# EAGLE board tqfp44-panelize (EAGLE 8.3.1)
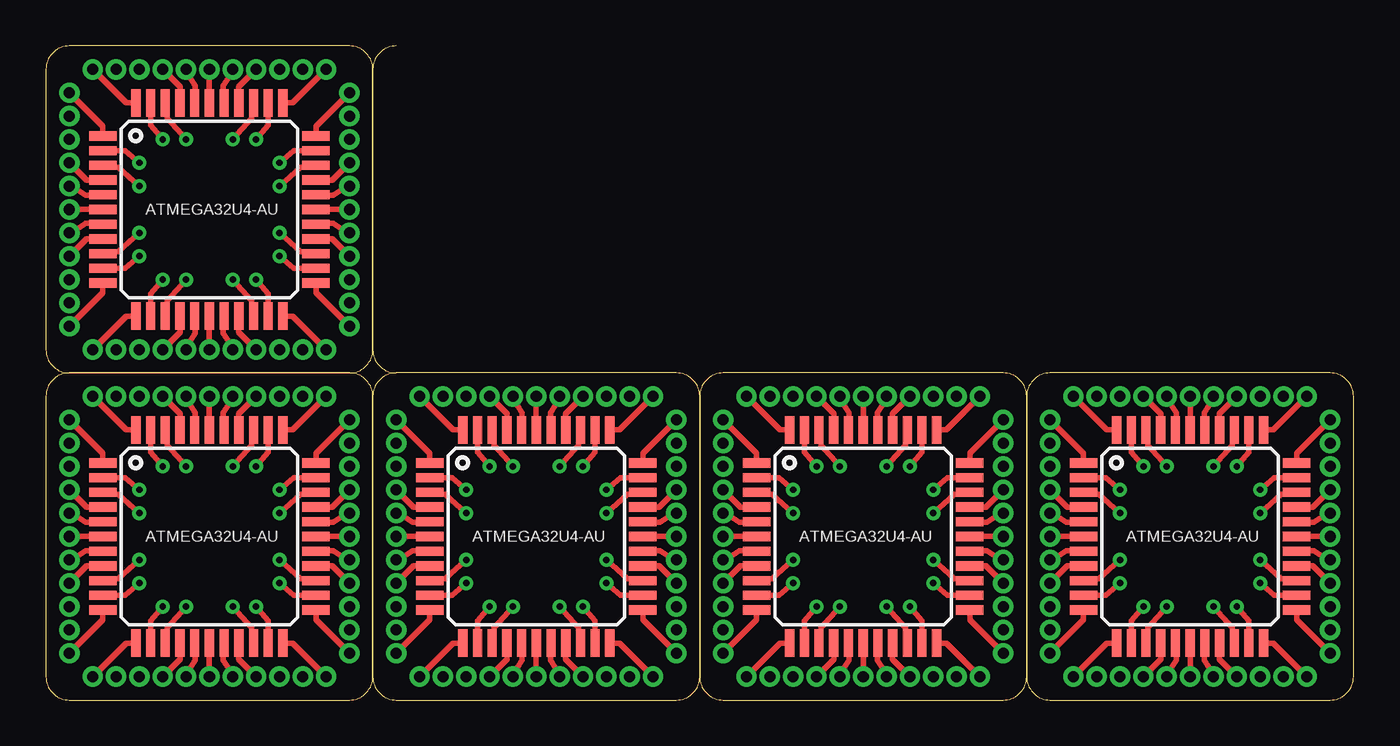
[diagram p0: board, top side]
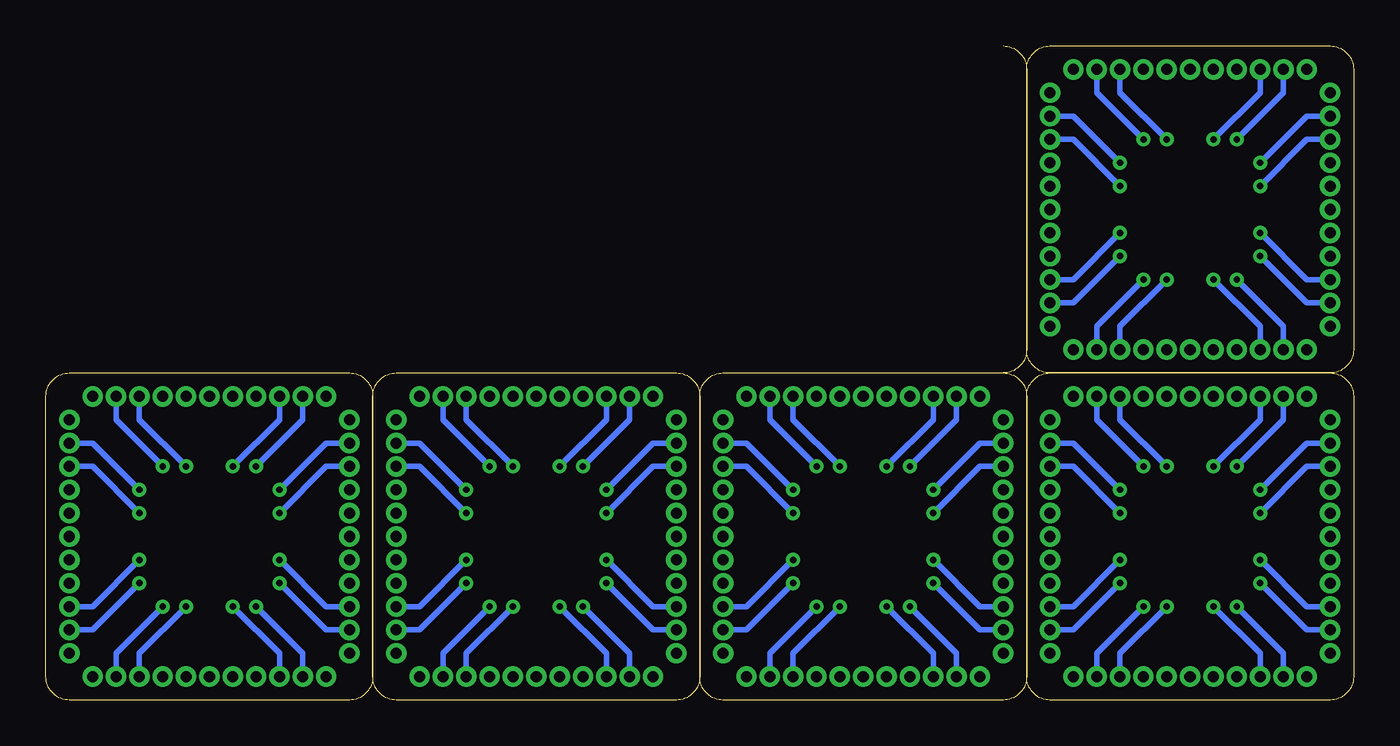
[diagram p1: board, bottom side, seen from below]

Size 71.12 x 35.56 mm. Coordinates in mm from the lower left corner, seen from the top.
Outline: 17.78,1.27 arc-90 16.51,0 1.27,0 arc-90 0,1.27 0,16.51 arc-90 1.27,17.78
Outline: 17.78,1.27 17.78,16.51
Outline: 17.78,16.51 arc90 16.51,17.78
Outline: 16.51,17.78 1.27,17.78
Outline: 35.56,1.27 arc-90 34.29,0 19.05,0 arc-90 17.78,1.27
Outline: 35.56,1.27 35.56,16.51
Outline: 35.56,16.51 arc90 34.29,17.78 19.05,17.78
Outline: 19.05,17.78 arc90 17.78,16.51
Outline: 17.78,16.51 17.78,1.27
Outline: 53.34,1.27 arc-90 52.07,0 36.83,0 arc-90 35.56,1.27
Outline: 53.34,1.27 53.34,16.51
Outline: 53.34,16.51 arc90 52.07,17.78 36.83,17.78 arc90 35.56,16.51
Outline: 35.56,16.51 35.56,1.27
Outline: 53.34,16.51 arc-90 54.61,17.78 69.85,17.78 arc-90 71.12,16.51 71.12,1.27 arc-90 69.85,0 54.61,0 arc-90 53.34,1.27
Outline: 53.34,16.51 53.34,1.27
Outline: 1.27,17.78 16.51,17.78
Outline: 16.51,17.78 arc90 17.78,19.05
Outline: 17.78,19.05 17.78,34.29
Outline: 17.78,34.29 arc90 16.51,35.56 1.27,35.56 arc90 0,34.29 0,19.05 arc90 1.27,17.78
Outline: 19.05,35.56 arc90 17.78,34.29
Outline: 17.78,34.29 17.78,19.05
Outline: 17.78,19.05 arc90 19.05,17.78
Copper layers (1*16): Top 0.035mm / dielectric 1.5mm / Bottom 0.035mm
Design rules "default *": minimum track width 6mil, minimum drill 0.35mm, track to track 6mil, track to pad 6mil, pad to pad 6mil, via to via 6mil, smd to smd 6mil, copper to edge 40mil, drill to drill 6mil, minimum pad ring 10mil, minimum via ring 8mil, stop-mask expansion 4mil, vias tented up to drill 0mil, thermal gap 10mil

## Footprints (pad centres in the part's own frame; a part is rotated, then mirrored left to right if it is on the bottom)
TQFP44 = smd 1.5 x 0.5: 1 -5.8,4; 2 -5.8,3.2; 3 -5.8,2.4; 4 -5.8,1.6; 5 -5.8,0.8; 6 -5.8,0; 7 -5.8,-0.8; 8 -5.8,-1.6; 9 -5.8,-2.4; 10 -5.8,-3.2; 11 -5.8,-4; 23 5.8,-4; 24 5.8,-3.2; 25 5.8,-2.4; 26 5.8,-1.6; 27 5.8,-0.8; 28 5.8,0; 29 5.8,0.8; 30 5.8,1.6; 31 5.8,2.4; 32 5.8,3.2; 33 5.8,4 | smd 0.5 x 1.5: 12 -4,-5.8; 13 -3.2,-5.8; 14 -2.4,-5.8; 15 -1.6,-5.8; 16 -0.8,-5.8; 17 0,-5.8; 18 0.8,-5.8; 19 1.6,-5.8; 20 2.4,-5.8; 21 3.2,-5.8; 22 4,-5.8; 34 4,5.8; 35 3.2,5.8; 36 2.4,5.8; 37 1.6,5.8; 38 0.8,5.8; 39 0,5.8; 40 -0.8,5.8; 41 -1.6,5.8; 42 -2.4,5.8; 43 -3.2,5.8; 44 -4,5.8
THROUHOLE11 = drill 0.6: 1 -6.35,0; 2 -5.08,0; 3 -3.81,0; 4 -2.54,0; 5 -1.27,0; 6 0,0; 7 1.27,0; 8 2.54,0; 9 3.81,0; 10 5.08,0; 11 6.35,0

## Placement (x,y rotation side)
IC1  ATMEGA32U4-AU  [TQFP44]  8.89,8.89 0 top
IC2  ATMEGA32U4-AU  [TQFP44]  26.67,8.89 0 top
IC3  ATMEGA32U4-AU  [TQFP44]  44.45,8.89 0 top
IC4  ATMEGA32U4-AU  [TQFP44]  62.23,8.89 0 top
IC5  ATMEGA32U4-AU  [TQFP44]  8.89,26.67 0 top
JP1  [THROUHOLE11]  1.27,8.89 270 top
JP2  [THROUHOLE11]  8.89,1.27 0 top
JP3  [THROUHOLE11]  16.51,8.89 90 top
JP4  [THROUHOLE11]  8.89,16.51 180 top
JP5  [THROUHOLE11]  19.05,8.89 270 top
JP6  [THROUHOLE11]  26.67,1.27 0 top
JP7  [THROUHOLE11]  34.29,8.89 90 top
JP8  [THROUHOLE11]  26.67,16.51 180 top
JP9  [THROUHOLE11]  36.83,8.89 270 top
JP10  [THROUHOLE11]  44.45,1.27 0 top
JP11  [THROUHOLE11]  52.07,8.89 90 top
JP12  [THROUHOLE11]  44.45,16.51 180 top
JP13  [THROUHOLE11]  54.61,8.89 270 top
JP14  [THROUHOLE11]  62.23,1.27 0 top
JP15  [THROUHOLE11]  69.85,8.89 90 top
JP16  [THROUHOLE11]  62.23,16.51 180 top
JP17  [THROUHOLE11]  1.27,26.67 270 top
JP18  [THROUHOLE11]  8.89,19.05 0 top
JP19  [THROUHOLE11]  16.51,26.67 90 top
JP20  [THROUHOLE11]  8.89,34.29 180 top

## Library data of the parts
IC1-IC5 = avr
JP1-JP20 = pinhead-half-pitch

## Nets
AREF: IC1.42 JP4.9
AREF1: IC2.42 JP8.9
AREF2: IC3.42 JP12.9
AREF3: IC4.42 JP16.9
AREF4: IC5.42 JP20.9
AVCC: IC1.24 JP3.2
AVCC1: IC1.44 JP4.11
AVCC2: IC2.24 JP7.2
AVCC3: IC2.44 JP8.11
AVCC4: IC3.24 JP11.2
AVCC5: IC3.44 JP12.11
AVCC6: IC4.24 JP15.2
AVCC7: IC4.44 JP16.11
AVCC8: IC5.24 JP19.2
AVCC9: IC5.44 JP20.11
D+: IC1.4 JP1.4
D+1: IC2.4 JP5.4
D+2: IC3.4 JP9.4
D+3: IC4.4 JP13.4
D+4: IC5.4 JP17.4
D-: IC1.3 JP1.3
D-1: IC2.3 JP5.3
D-2: IC3.3 JP9.3
D-3: IC4.3 JP13.3
D-4: IC5.3 JP17.3
GND: IC1.15 JP2.4
GND1: IC1.23 JP3.1
GND2: IC1.35 JP4.2
GND3: IC1.43 JP4.10
GND4: IC2.15 JP6.4
GND5: IC2.23 JP7.1
GND6: IC2.35 JP8.2
GND7: IC2.43 JP8.10
GND8: IC3.15 JP10.4
GND9: IC3.23 JP11.1
GND10: IC3.35 JP12.2
GND11: IC3.43 JP12.10
GND12: IC4.15 JP14.4
GND13: IC4.23 JP15.1
GND14: IC4.35 JP16.2
GND15: IC4.43 JP16.10
GND16: IC5.15 JP18.4
GND17: IC5.23 JP19.1
GND18: IC5.35 JP20.2
GND19: IC5.43 JP20.10
PB0: IC1.8 JP1.8
PB1: IC1.9 JP1.9
PB2: IC1.10 JP1.10
PB3: IC1.11 JP1.11
PB4: IC1.28 JP3.6
PB5: IC1.29 JP3.7
PB6: IC1.30 JP3.8
PB7: IC1.12 JP2.1
PB8: IC2.12 JP6.1
PB9: IC2.30 JP7.8
PB10: IC2.29 JP7.7
PB11: IC2.28 JP7.6
PB12: IC2.11 JP5.11
PB13: IC2.10 JP5.10
PB14: IC2.9 JP5.9
PB15: IC2.8 JP5.8
PB16: IC3.12 JP10.1
PB17: IC3.30 JP11.8
PB18: IC3.29 JP11.7
PB19: IC3.28 JP11.6
PB20: IC3.11 JP9.11
PB21: IC3.10 JP9.10
PB22: IC3.9 JP9.9
PB23: IC3.8 JP9.8
PB24: IC4.12 JP14.1
PB25: IC4.30 JP15.8
PB26: IC4.29 JP15.7
PB27: IC4.28 JP15.6
PB28: IC4.11 JP13.11
PB29: IC4.10 JP13.10
PB30: IC4.9 JP13.9
PB31: IC4.8 JP13.8
PB32: IC5.12 JP18.1
PB33: IC5.30 JP19.8
PB34: IC5.29 JP19.7
PB35: IC5.28 JP19.6
PB36: IC5.11 JP17.11
PB37: IC5.10 JP17.10
PB38: IC5.9 JP17.9
PB39: IC5.8 JP17.8
PC1: IC2.31 JP7.9
PC2: IC2.32 JP7.10
PC3: IC3.31 JP11.9
PC4: IC3.32 JP11.10
PC5: IC4.31 JP15.9
PC6: IC1.31 JP3.9
PC7: IC1.32 JP3.10
PC8: IC4.32 JP15.10
PC9: IC5.31 JP19.9
PC10: IC5.32 JP19.10
PD0: IC1.18 JP2.7
PD1: IC1.19 JP2.8
PD2: IC1.20 JP2.9
PD3: IC1.21 JP2.10
PD4: IC1.25 JP3.3
PD5: IC1.22 JP2.11
PD6: IC1.26 JP3.4
PD7: IC1.27 JP3.5
PD8: IC2.27 JP7.5
PD9: IC2.26 JP7.4
PD10: IC2.22 JP6.11
PD11: IC2.25 JP7.3
PD12: IC2.21 JP6.10
PD13: IC2.20 JP6.9
PD14: IC2.19 JP6.8
PD15: IC2.18 JP6.7
PD16: IC3.27 JP11.5
PD17: IC3.26 JP11.4
PD18: IC3.22 JP10.11
PD19: IC3.25 JP11.3
PD20: IC3.21 JP10.10
PD21: IC3.20 JP10.9
PD22: IC3.19 JP10.8
PD23: IC3.18 JP10.7
PD24: IC4.27 JP15.5
PD25: IC4.26 JP15.4
PD26: IC4.22 JP14.11
PD27: IC4.25 JP15.3
PD28: IC4.21 JP14.10
PD29: IC4.20 JP14.9
PD30: IC4.19 JP14.8
PD31: IC4.18 JP14.7
PD32: IC5.27 JP19.5
PD33: IC5.26 JP19.4
PD34: IC5.22 JP18.11
PD35: IC5.25 JP19.3
PD36: IC5.21 JP18.10
PD37: IC5.20 JP18.9
PD38: IC5.19 JP18.8
PD39: IC5.18 JP18.7
PE1: IC2.33 JP7.11
PE2: IC1.33 JP3.11
PE3: IC2.1 JP5.1
PE4: IC3.33 JP11.11
PE5: IC3.1 JP9.1
PE6: IC1.1 JP1.1
PE7: IC4.33 JP15.11
PE8: IC4.1 JP13.1
PE9: IC5.33 JP19.11
PE10: IC5.1 JP17.1
PF0: IC1.41 JP4.8
PF1: IC1.40 JP4.7
PF2: IC2.41 JP8.8
PF3: IC2.40 JP8.7
PF4: IC1.39 JP4.6
PF5: IC1.38 JP4.5
PF6: IC1.37 JP4.4
PF7: IC1.36 JP4.3
PF8: IC2.39 JP8.6
PF9: IC2.38 JP8.5
PF10: IC2.37 JP8.4
PF11: IC2.36 JP8.3
PF12: IC3.41 JP12.8
PF13: IC3.40 JP12.7
PF14: IC3.39 JP12.6
PF15: IC3.38 JP12.5
PF16: IC3.37 JP12.4
PF17: IC3.36 JP12.3
PF18: IC4.41 JP16.8
PF19: IC4.40 JP16.7
PF20: IC4.39 JP16.6
PF21: IC4.38 JP16.5
PF22: IC4.37 JP16.4
PF23: IC4.36 JP16.3
PF24: IC5.41 JP20.8
PF25: IC5.40 JP20.7
PF26: IC5.39 JP20.6
PF27: IC5.38 JP20.5
PF28: IC5.37 JP20.4
PF29: IC5.36 JP20.3
RESET: IC1.13 JP2.2
RESET1: IC2.13 JP6.2
RESET2: IC3.13 JP10.2
RESET3: IC4.13 JP14.2
RESET4: IC5.13 JP18.2
UCAP: IC1.6 JP1.6
UCAP1: IC2.6 JP5.6
UCAP2: IC3.6 JP9.6
UCAP3: IC4.6 JP13.6
UCAP4: IC5.6 JP17.6
UGND: IC1.5 JP1.5
UGND1: IC2.5 JP5.5
UGND2: IC3.5 JP9.5
UGND3: IC4.5 JP13.5
UGND4: IC5.5 JP17.5
UVCC: IC1.2 JP1.2
UVCC1: IC2.2 JP5.2
UVCC2: IC3.2 JP9.2
UVCC3: IC4.2 JP13.2
UVCC4: IC5.2 JP17.2
VBUS: IC1.7 JP1.7
VBUS1: IC2.7 JP5.7
VBUS2: IC3.7 JP9.7
VBUS3: IC4.7 JP13.7
VBUS4: IC5.7 JP17.7
VCC: IC1.14 JP2.3
VCC1: IC1.34 JP4.1
VCC2: IC2.14 JP6.3
VCC3: IC2.34 JP8.1
VCC4: IC3.14 JP10.3
VCC5: IC3.34 JP12.1
VCC6: IC4.14 JP14.3
VCC7: IC4.34 JP16.1
VCC8: IC5.14 JP18.3
VCC9: IC5.34 JP20.1
XTAL1: IC1.17 JP2.6
XTAL2: IC1.16 JP2.5
XTAL3: IC2.17 JP6.6
XTAL4: IC2.16 JP6.5
XTAL5: IC3.17 JP10.6
XTAL6: IC3.16 JP10.5
XTAL7: IC4.17 JP14.6
XTAL8: IC4.16 JP14.5
XTAL9: IC5.17 JP18.6
XTAL10: IC5.16 JP18.5

## Tracks (layer width: path | path; a pad name or v marks a point on that pad's centre or on a via)
AREF  (via drill 0.35)
  Top 0.305: IC1.42 6.6,13.84 v7.62,12.7
  Bottom 0.305: JP4.9 5.08,15.24 v7.62,12.7
AREF1  (via drill 0.35)
  Top 0.305: IC2.42 24.38,13.84 v25.4,12.7
  Bottom 0.305: JP8.9 22.86,15.24 v25.4,12.7
AREF2  (via drill 0.35)
  Top 0.305: IC3.42 42.16,13.84 v43.18,12.7
  Bottom 0.305: JP12.9 40.64,15.24 v43.18,12.7
AREF3  (via drill 0.35)
  Top 0.305: IC4.42 59.94,13.84 v60.96,12.7
  Bottom 0.305: JP16.9 58.42,15.24 v60.96,12.7
AREF4  (via drill 0.35)
  Top 0.305: IC5.42 6.6,31.62 v7.62,30.48
  Bottom 0.305: JP20.9 5.08,33.02 v7.62,30.48
AVCC  (via drill 0.35)
  Top 0.305: IC1.24 13.46,5.69 v12.7,6.35
  Bottom 0.305: v12.7,6.35 15.24,3.81 JP3.2
AVCC1
  Top 0.305: IC1.44 4.36,14.69 JP4.11
AVCC2  (via drill 0.35)
  Top 0.305: IC2.24 31.24,5.69 v30.48,6.35
  Bottom 0.305: v30.48,6.35 33.02,3.81 JP7.2
AVCC3
  Top 0.305: IC2.44 22.14,14.69 JP8.11
AVCC4  (via drill 0.35)
  Top 0.305: IC3.24 49.02,5.69 v48.26,6.35
  Bottom 0.305: v48.26,6.35 50.8,3.81 JP11.2
AVCC5
  Top 0.305: IC3.44 39.92,14.69 JP12.11
AVCC6  (via drill 0.35)
  Top 0.305: IC4.24 66.8,5.69 v66.04,6.35
  Bottom 0.305: v66.04,6.35 68.58,3.81 JP15.2
AVCC7
  Top 0.305: IC4.44 57.7,14.69 JP16.11
AVCC8  (via drill 0.35)
  Top 0.305: IC5.24 13.46,23.47 v12.7,24.13
  Bottom 0.305: v12.7,24.13 15.24,21.59 JP19.2
AVCC9
  Top 0.305: IC5.44 4.36,32.47 JP20.11
D+
  Top 0.305: IC1.4 2.21,10.49 JP1.4
D+1
  Top 0.305: IC2.4 19.99,10.49 JP5.4
D+2
  Top 0.305: IC3.4 37.77,10.49 JP9.4
D+3
  Top 0.305: IC4.4 55.55,10.49 JP13.4
D+4
  Top 0.305: IC5.4 2.21,28.27 JP17.4
D-  (via drill 0.35)
  Top 0.305: IC1.3 3.94,11.18 v5.08,10.16
  Bottom 0.305: JP1.3 2.54,12.7 v5.08,10.16
D-1  (via drill 0.35)
  Top 0.305: IC2.3 21.72,11.18 v22.86,10.16
  Bottom 0.305: JP5.3 20.32,12.7 v22.86,10.16
D-2  (via drill 0.35)
  Top 0.305: IC3.3 39.5,11.18 v40.64,10.16
  Bottom 0.305: JP9.3 38.1,12.7 v40.64,10.16
D-3  (via drill 0.35)
  Top 0.305: IC4.3 57.28,11.18 v58.42,10.16
  Bottom 0.305: JP13.3 55.88,12.7 v58.42,10.16
D-4  (via drill 0.35)
  Top 0.305: IC5.3 3.94,28.96 v5.08,27.94
  Bottom 0.305: JP17.3 2.54,30.48 v5.08,27.94
GND
  Top 0.305: IC1.15 7.29,2.21 JP2.4
GND1
  Top 0.305: IC1.23 14.69,4.36 JP3.1
GND2  (via drill 0.35)
  Top 0.305: IC1.35 12.09,13.46 v11.43,12.7
  Bottom 0.305: v11.43,12.7 13.97,15.24 JP4.2
GND3  (via drill 0.35)
  Top 0.305: IC1.43 5.69,13.46 v6.35,12.7
  Bottom 0.305: v6.35,12.7 3.81,15.24 JP4.10
GND4
  Top 0.305: IC2.15 25.07,2.21 JP6.4
GND5
  Top 0.305: IC2.23 32.47,4.36 JP7.1
GND6  (via drill 0.35)
  Top 0.305: IC2.35 29.87,13.46 v29.21,12.7
  Bottom 0.305: v29.21,12.7 31.75,15.24 JP8.2
GND7  (via drill 0.35)
  Top 0.305: IC2.43 23.47,13.46 v24.13,12.7
  Bottom 0.305: v24.13,12.7 21.59,15.24 JP8.10
GND8
  Top 0.305: IC3.15 42.85,2.21 JP10.4
GND9
  Top 0.305: IC3.23 50.25,4.36 JP11.1
GND10  (via drill 0.35)
  Top 0.305: IC3.35 47.65,13.46 v46.99,12.7
  Bottom 0.305: v46.99,12.7 49.53,15.24 JP12.2
GND11  (via drill 0.35)
  Top 0.305: IC3.43 41.25,13.46 v41.91,12.7
  Bottom 0.305: v41.91,12.7 39.37,15.24 JP12.10
GND12
  Top 0.305: IC4.15 60.63,2.21 JP14.4
GND13
  Top 0.305: IC4.23 68.03,4.36 JP15.1
GND14  (via drill 0.35)
  Top 0.305: IC4.35 65.43,13.46 v64.77,12.7
  Bottom 0.305: v64.77,12.7 67.31,15.24 JP16.2
GND15  (via drill 0.35)
  Top 0.305: IC4.43 59.03,13.46 v59.69,12.7
  Bottom 0.305: v59.69,12.7 57.15,15.24 JP16.10
GND16
  Top 0.305: IC5.15 7.29,19.99 JP18.4
GND17
  Top 0.305: IC5.23 14.69,22.14 JP19.1
GND18  (via drill 0.35)
  Top 0.305: IC5.35 12.09,31.24 v11.43,30.48
  Bottom 0.305: v11.43,30.48 13.97,33.02 JP20.2
GND19  (via drill 0.35)
  Top 0.305: IC5.43 5.69,31.24 v6.35,30.48
  Bottom 0.305: v6.35,30.48 3.81,33.02 JP20.10
PB0
  Top 0.305: IC1.8 2.21,7.29 JP1.8
PB1  (via drill 0.35)
  Top 0.305: IC1.9 3.94,6.6 v5.08,7.62
  Bottom 0.305: JP1.9 2.54,5.08 v5.08,7.62
PB2  (via drill 0.35)
  Top 0.305: IC1.10 4.32,5.69 v5.08,6.35
  Bottom 0.305: v5.08,6.35 2.54,3.81 JP1.10
PB3
  Top 0.305: IC1.11 3.09,4.36 JP1.11
PB4
  Top 0.305: JP3.6 IC1.28
PB5
  Top 0.305: JP3.7 16.38,10.16 15.62,9.65 14.78,9.65 IC1.29
PB6
  Top 0.305: IC1.30 15.57,10.49 JP3.8
PB7
  Top 0.305: IC1.12 4.36,3.09 JP2.1
PB8
  Top 0.305: IC2.12 22.14,3.09 JP6.1
PB9
  Top 0.305: IC2.30 33.35,10.49 JP7.8
PB10
  Top 0.305: JP7.7 34.16,10.16 33.4,9.65 32.56,9.65 IC2.29
PB11
  Top 0.305: JP7.6 IC2.28
PB12
  Top 0.305: IC2.11 20.87,4.36 JP5.11
PB13  (via drill 0.35)
  Top 0.305: IC2.10 22.1,5.69 v22.86,6.35
  Bottom 0.305: v22.86,6.35 20.32,3.81 JP5.10
PB14  (via drill 0.35)
  Top 0.305: IC2.9 21.72,6.6 v22.86,7.62
  Bottom 0.305: JP5.9 20.32,5.08 v22.86,7.62
PB15
  Top 0.305: IC2.8 19.99,7.29 JP5.8
PB16
  Top 0.305: IC3.12 39.92,3.09 JP10.1
PB17
  Top 0.305: IC3.30 51.13,10.49 JP11.8
PB18
  Top 0.305: JP11.7 51.94,10.16 51.18,9.65 50.34,9.65 IC3.29
PB19
  Top 0.305: JP11.6 IC3.28
PB20
  Top 0.305: IC3.11 38.65,4.36 JP9.11
PB21  (via drill 0.35)
  Top 0.305: IC3.10 39.88,5.69 v40.64,6.35
  Bottom 0.305: v40.64,6.35 38.1,3.81 JP9.10
PB22  (via drill 0.35)
  Top 0.305: IC3.9 39.5,6.6 v40.64,7.62
  Bottom 0.305: JP9.9 38.1,5.08 v40.64,7.62
PB23
  Top 0.305: IC3.8 37.77,7.29 JP9.8
PB24
  Top 0.305: IC4.12 57.7,3.09 JP14.1
PB25
  Top 0.305: IC4.30 68.91,10.49 JP15.8
PB26
  Top 0.305: JP15.7 69.72,10.16 68.96,9.65 68.12,9.65 IC4.29
PB27
  Top 0.305: JP15.6 IC4.28
PB28
  Top 0.305: IC4.11 56.43,4.36 JP13.11
PB29  (via drill 0.35)
  Top 0.305: IC4.10 57.66,5.69 v58.42,6.35
  Bottom 0.305: v58.42,6.35 55.88,3.81 JP13.10
PB30  (via drill 0.35)
  Top 0.305: IC4.9 57.28,6.6 v58.42,7.62
  Bottom 0.305: JP13.9 55.88,5.08 v58.42,7.62
PB31
  Top 0.305: IC4.8 55.55,7.29 JP13.8
PB32
  Top 0.305: IC5.12 4.36,20.87 JP18.1
PB33
  Top 0.305: IC5.30 15.57,28.27 JP19.8
PB34
  Top 0.305: JP19.7 16.38,27.94 15.62,27.43 14.78,27.43 IC5.29
PB35
  Top 0.305: JP19.6 IC5.28
PB36
  Top 0.305: IC5.11 3.09,22.14 JP17.11
PB37  (via drill 0.35)
  Top 0.305: IC5.10 4.32,23.47 v5.08,24.13
  Bottom 0.305: v5.08,24.13 2.54,21.59 JP17.10
PB38  (via drill 0.35)
  Top 0.305: IC5.9 3.94,24.38 v5.08,25.4
  Bottom 0.305: JP17.9 2.54,22.86 v5.08,25.4
PB39
  Top 0.305: IC5.8 2.21,25.07 JP17.8
PC1  (via drill 0.35)
  Top 0.305: IC2.31 31.62,11.18 v30.48,10.16
  Bottom 0.305: JP7.9 33.02,12.7 v30.48,10.16
PC2  (via drill 0.35)
  Top 0.305: IC2.32 31.24,12.09 v30.48,11.43
  Bottom 0.305: v30.48,11.43 33.02,13.97 JP7.10
PC3  (via drill 0.35)
  Top 0.305: IC3.31 49.4,11.18 v48.26,10.16
  Bottom 0.305: JP11.9 50.8,12.7 v48.26,10.16
PC4  (via drill 0.35)
  Top 0.305: IC3.32 49.02,12.09 v48.26,11.43
  Bottom 0.305: v48.26,11.43 50.8,13.97 JP11.10
PC5  (via drill 0.35)
  Top 0.305: IC4.31 67.18,11.18 v66.04,10.16
  Bottom 0.305: JP15.9 68.58,12.7 v66.04,10.16
PC6  (via drill 0.35)
  Top 0.305: IC1.31 13.84,11.18 v12.7,10.16
  Bottom 0.305: JP3.9 15.24,12.7 v12.7,10.16
PC7  (via drill 0.35)
  Top 0.305: IC1.32 13.46,12.09 v12.7,11.43
  Bottom 0.305: v12.7,11.43 15.24,13.97 JP3.10
PC8  (via drill 0.35)
  Top 0.305: IC4.32 66.8,12.09 v66.04,11.43
  Bottom 0.305: v66.04,11.43 68.58,13.97 JP15.10
PC9  (via drill 0.35)
  Top 0.305: IC5.31 13.84,28.96 v12.7,27.94
  Bottom 0.305: JP19.9 15.24,30.48 v12.7,27.94
PC10  (via drill 0.35)
  Top 0.305: IC5.32 13.46,29.87 v12.7,29.21
  Bottom 0.305: v12.7,29.21 15.24,31.75 JP19.10
PD0
  Top 0.305: JP2.7 10.16,1.4 9.65,2.16 9.65,3 IC1.18
PD1
  Top 0.305: IC1.19 10.49,2.21 JP2.8
PD2  (via drill 0.35)
  Top 0.305: IC1.20 11.18,3.94 v10.16,5.08
  Bottom 0.305: JP2.9 12.7,2.54 v10.16,5.08
PD3  (via drill 0.35)
  Top 0.305: IC1.21 12.09,4.32 v11.43,5.08
  Bottom 0.305: v11.43,5.08 13.97,2.54 JP2.10
PD4  (via drill 0.35)
  Top 0.305: IC1.25 13.84,6.6 v12.7,7.62
  Bottom 0.305: JP3.3 15.24,5.08 v12.7,7.62
PD5
  Top 0.305: IC1.22 13.42,3.09 JP2.11
PD6
  Top 0.305: IC1.26 15.57,7.29 JP3.4
PD7
  Top 0.305: JP3.5 16.38,7.62 15.62,8.13 14.78,8.13 IC1.27
PD8
  Top 0.305: JP7.5 34.16,7.62 33.4,8.13 32.56,8.13 IC2.27
PD9
  Top 0.305: IC2.26 33.35,7.29 JP7.4
PD10
  Top 0.305: IC2.22 31.2,3.09 JP6.11
PD11  (via drill 0.35)
  Top 0.305: IC2.25 31.62,6.6 v30.48,7.62
  Bottom 0.305: JP7.3 33.02,5.08 v30.48,7.62
PD12  (via drill 0.35)
  Top 0.305: IC2.21 29.87,4.32 v29.21,5.08
  Bottom 0.305: v29.21,5.08 31.75,2.54 JP6.10
PD13  (via drill 0.35)
  Top 0.305: IC2.20 28.96,3.94 v27.94,5.08
  Bottom 0.305: JP6.9 30.48,2.54 v27.94,5.08
PD14
  Top 0.305: IC2.19 28.27,2.21 JP6.8
PD15
  Top 0.305: JP6.7 27.94,1.4 27.43,2.16 27.43,3 IC2.18
PD16
  Top 0.305: JP11.5 51.94,7.62 51.18,8.13 50.34,8.13 IC3.27
PD17
  Top 0.305: IC3.26 51.13,7.29 JP11.4
PD18
  Top 0.305: IC3.22 48.98,3.09 JP10.11
PD19  (via drill 0.35)
  Top 0.305: IC3.25 49.4,6.6 v48.26,7.62
  Bottom 0.305: JP11.3 50.8,5.08 v48.26,7.62
PD20  (via drill 0.35)
  Top 0.305: IC3.21 47.65,4.32 v46.99,5.08
  Bottom 0.305: v46.99,5.08 49.53,2.54 JP10.10
PD21  (via drill 0.35)
  Top 0.305: IC3.20 46.74,3.94 v45.72,5.08
  Bottom 0.305: JP10.9 48.26,2.54 v45.72,5.08
PD22
  Top 0.305: IC3.19 46.05,2.21 JP10.8
PD23
  Top 0.305: JP10.7 45.72,1.4 45.21,2.16 45.21,3 IC3.18
PD24
  Top 0.305: JP15.5 69.72,7.62 68.96,8.13 68.12,8.13 IC4.27
PD25
  Top 0.305: IC4.26 68.91,7.29 JP15.4
PD26
  Top 0.305: IC4.22 66.76,3.09 JP14.11
PD27  (via drill 0.35)
  Top 0.305: IC4.25 67.18,6.6 v66.04,7.62
  Bottom 0.305: JP15.3 68.58,5.08 v66.04,7.62
PD28  (via drill 0.35)
  Top 0.305: IC4.21 65.43,4.32 v64.77,5.08
  Bottom 0.305: v64.77,5.08 67.31,2.54 JP14.10
PD29  (via drill 0.35)
  Top 0.305: IC4.20 64.52,3.94 v63.5,5.08
  Bottom 0.305: JP14.9 66.04,2.54 v63.5,5.08
PD30
  Top 0.305: IC4.19 63.83,2.21 JP14.8
PD31
  Top 0.305: JP14.7 63.5,1.4 62.99,2.16 62.99,3 IC4.18
PD32
  Top 0.305: JP19.5 16.38,25.4 15.62,25.91 14.78,25.91 IC5.27
PD33
  Top 0.305: IC5.26 15.57,25.07 JP19.4
PD34
  Top 0.305: IC5.22 13.42,20.87 JP18.11
PD35  (via drill 0.35)
  Top 0.305: IC5.25 13.84,24.38 v12.7,25.4
  Bottom 0.305: JP19.3 15.24,22.86 v12.7,25.4
PD36  (via drill 0.35)
  Top 0.305: IC5.21 12.09,22.1 v11.43,22.86
  Bottom 0.305: v11.43,22.86 13.97,20.32 JP18.10
PD37  (via drill 0.35)
  Top 0.305: IC5.20 11.18,21.72 v10.16,22.86
  Bottom 0.305: JP18.9 12.7,20.32 v10.16,22.86
PD38
  Top 0.305: IC5.19 10.49,19.99 JP18.8
PD39
  Top 0.305: JP18.7 10.16,19.18 9.65,19.94 9.65,20.78 IC5.18
PE1
  Top 0.305: IC2.33 32.47,13.42 JP7.11
PE2
  Top 0.305: IC1.33 14.69,13.42 JP3.11
PE3
  Top 0.305: IC2.1 20.87,13.42 JP5.1
PE4
  Top 0.305: IC3.33 50.25,13.42 JP11.11
PE5
  Top 0.305: IC3.1 38.65,13.42 JP9.1
PE6
  Top 0.305: IC1.1 3.09,13.42 JP1.1
PE7
  Top 0.305: IC4.33 68.03,13.42 JP15.11
PE8
  Top 0.305: IC4.1 56.43,13.42 JP13.1
PE9
  Top 0.305: IC5.33 14.69,31.2 JP19.11
PE10
  Top 0.305: IC5.1 3.09,31.2 JP17.1
PF0
  Top 0.305: IC1.41 7.29,15.57 JP4.8
PF1
  Top 0.305: JP4.7 7.62,16.38 8.13,15.62 8.13,14.78 IC1.40
PF2
  Top 0.305: IC2.41 25.07,15.57 JP8.8
PF3
  Top 0.305: JP8.7 25.4,16.38 25.91,15.62 25.91,14.78 IC2.40
PF4
  Top 0.305: JP4.6 IC1.39
PF5
  Top 0.305: JP4.5 10.16,16.38 9.65,15.62 9.65,14.78 IC1.38
PF6
  Top 0.305: IC1.37 10.49,15.57 JP4.4
PF7  (via drill 0.35)
  Top 0.305: IC1.36 11.18,13.84 v10.16,12.7
  Bottom 0.305: JP4.3 12.7,15.24 v10.16,12.7
PF8
  Top 0.305: JP8.6 IC2.39
PF9
  Top 0.305: JP8.5 27.94,16.38 27.43,15.62 27.43,14.78 IC2.38
PF10
  Top 0.305: IC2.37 28.27,15.57 JP8.4
PF11  (via drill 0.35)
  Top 0.305: IC2.36 28.96,13.84 v27.94,12.7
  Bottom 0.305: JP8.3 30.48,15.24 v27.94,12.7
PF12
  Top 0.305: IC3.41 42.85,15.57 JP12.8
PF13
  Top 0.305: JP12.7 43.18,16.38 43.69,15.62 43.69,14.78 IC3.40
PF14
  Top 0.305: JP12.6 IC3.39
PF15
  Top 0.305: JP12.5 45.72,16.38 45.21,15.62 45.21,14.78 IC3.38
PF16
  Top 0.305: IC3.37 46.05,15.57 JP12.4
PF17  (via drill 0.35)
  Top 0.305: IC3.36 46.74,13.84 v45.72,12.7
  Bottom 0.305: JP12.3 48.26,15.24 v45.72,12.7
PF18
  Top 0.305: IC4.41 60.63,15.57 JP16.8
PF19
  Top 0.305: JP16.7 60.96,16.38 61.47,15.62 61.47,14.78 IC4.40
PF20
  Top 0.305: JP16.6 IC4.39
PF21
  Top 0.305: JP16.5 63.5,16.38 62.99,15.62 62.99,14.78 IC4.38
PF22
  Top 0.305: IC4.37 63.83,15.57 JP16.4
PF23  (via drill 0.35)
  Top 0.305: IC4.36 64.52,13.84 v63.5,12.7
  Bottom 0.305: JP16.3 66.04,15.24 v63.5,12.7
PF24
  Top 0.305: IC5.41 7.29,33.35 JP20.8
PF25
  Top 0.305: JP20.7 7.62,34.16 8.13,33.4 8.13,32.56 IC5.40
PF26
  Top 0.305: JP20.6 IC5.39
PF27
  Top 0.305: JP20.5 10.16,34.16 9.65,33.4 9.65,32.56 IC5.38
PF28
  Top 0.305: IC5.37 10.49,33.35 JP20.4
PF29  (via drill 0.35)
  Top 0.305: IC5.36 11.18,31.62 v10.16,30.48
  Bottom 0.305: JP20.3 12.7,33.02 v10.16,30.48
RESET  (via drill 0.35)
  Top 0.305: IC1.13 5.69,4.32 v6.35,5.08
  Bottom 0.305: v6.35,5.08 3.81,2.54 JP2.2
RESET1  (via drill 0.35)
  Top 0.305: IC2.13 23.47,4.32 v24.13,5.08
  Bottom 0.305: v24.13,5.08 21.59,2.54 JP6.2
RESET2  (via drill 0.35)
  Top 0.305: IC3.13 41.25,4.32 v41.91,5.08
  Bottom 0.305: v41.91,5.08 39.37,2.54 JP10.2
RESET3  (via drill 0.35)
  Top 0.305: IC4.13 59.03,4.32 v59.69,5.08
  Bottom 0.305: v59.69,5.08 57.15,2.54 JP14.2
RESET4  (via drill 0.35)
  Top 0.305: IC5.13 5.69,22.1 v6.35,22.86
  Bottom 0.305: v6.35,22.86 3.81,20.32 JP18.2
UCAP
  Top 0.305: JP1.6 IC1.6
UCAP1
  Top 0.305: JP5.6 IC2.6
UCAP2
  Top 0.305: JP9.6 IC3.6
UCAP3
  Top 0.305: JP13.6 IC4.6
UCAP4
  Top 0.305: JP17.6 IC5.6
UGND
  Top 0.305: JP1.5 1.4,10.16 2.16,9.65 3,9.65 IC1.5
UGND1
  Top 0.305: JP5.5 19.18,10.16 19.94,9.65 20.78,9.65 IC2.5
UGND2
  Top 0.305: JP9.5 36.96,10.16 37.72,9.65 38.56,9.65 IC3.5
UGND3
  Top 0.305: JP13.5 54.74,10.16 55.5,9.65 56.34,9.65 IC4.5
UGND4
  Top 0.305: JP17.5 1.4,27.94 2.16,27.43 3,27.43 IC5.5
UVCC  (via drill 0.35)
  Top 0.305: IC1.2 4.32,12.09 v5.08,11.43
  Bottom 0.305: v5.08,11.43 2.54,13.97 JP1.2
UVCC1  (via drill 0.35)
  Top 0.305: IC2.2 22.1,12.09 v22.86,11.43
  Bottom 0.305: v22.86,11.43 20.32,13.97 JP5.2
UVCC2  (via drill 0.35)
  Top 0.305: IC3.2 39.88,12.09 v40.64,11.43
  Bottom 0.305: v40.64,11.43 38.1,13.97 JP9.2
UVCC3  (via drill 0.35)
  Top 0.305: IC4.2 57.66,12.09 v58.42,11.43
  Bottom 0.305: v58.42,11.43 55.88,13.97 JP13.2
UVCC4  (via drill 0.35)
  Top 0.305: IC5.2 4.32,29.87 v5.08,29.21
  Bottom 0.305: v5.08,29.21 2.54,31.75 JP17.2
VBUS
  Top 0.305: JP1.7 1.4,7.62 2.16,8.13 3,8.13 IC1.7
VBUS1
  Top 0.305: JP5.7 19.18,7.62 19.94,8.13 20.78,8.13 IC2.7
VBUS2
  Top 0.305: JP9.7 36.96,7.62 37.72,8.13 38.56,8.13 IC3.7
VBUS3
  Top 0.305: JP13.7 54.74,7.62 55.5,8.13 56.34,8.13 IC4.7
VBUS4
  Top 0.305: JP17.7 1.4,25.4 2.16,25.91 3,25.91 IC5.7
VCC  (via drill 0.35)
  Top 0.305: IC1.14 6.6,3.94 v7.62,5.08
  Bottom 0.305: JP2.3 5.08,2.54 v7.62,5.08
VCC1
  Top 0.305: IC1.34 13.42,14.69 JP4.1
VCC2  (via drill 0.35)
  Top 0.305: IC2.14 24.38,3.94 v25.4,5.08
  Bottom 0.305: JP6.3 22.86,2.54 v25.4,5.08
VCC3
  Top 0.305: IC2.34 31.2,14.69 JP8.1
VCC4  (via drill 0.35)
  Top 0.305: IC3.14 42.16,3.94 v43.18,5.08
  Bottom 0.305: JP10.3 40.64,2.54 v43.18,5.08
VCC5
  Top 0.305: IC3.34 48.98,14.69 JP12.1
VCC6  (via drill 0.35)
  Top 0.305: IC4.14 59.94,3.94 v60.96,5.08
  Bottom 0.305: JP14.3 58.42,2.54 v60.96,5.08
VCC7
  Top 0.305: IC4.34 66.76,14.69 JP16.1
VCC8  (via drill 0.35)
  Top 0.305: IC5.14 6.6,21.72 v7.62,22.86
  Bottom 0.305: JP18.3 5.08,20.32 v7.62,22.86
VCC9
  Top 0.305: IC5.34 13.42,32.47 JP20.1
XTAL1
  Top 0.305: JP2.6 IC1.17
XTAL2
  Top 0.305: JP2.5 7.62,1.4 8.13,2.16 8.13,3 IC1.16
XTAL3
  Top 0.305: JP6.6 IC2.17
XTAL4
  Top 0.305: JP6.5 25.4,1.4 25.91,2.16 25.91,3 IC2.16
XTAL5
  Top 0.305: JP10.6 IC3.17
XTAL6
  Top 0.305: JP10.5 43.18,1.4 43.69,2.16 43.69,3 IC3.16
XTAL7
  Top 0.305: JP14.6 IC4.17
XTAL8
  Top 0.305: JP14.5 60.96,1.4 61.47,2.16 61.47,3 IC4.16
XTAL9
  Top 0.305: JP18.6 IC5.17
XTAL10
  Top 0.305: JP18.5 7.62,19.18 8.13,19.94 8.13,20.78 IC5.16